# EAGLE board decoder (EAGLE 7.2.0)
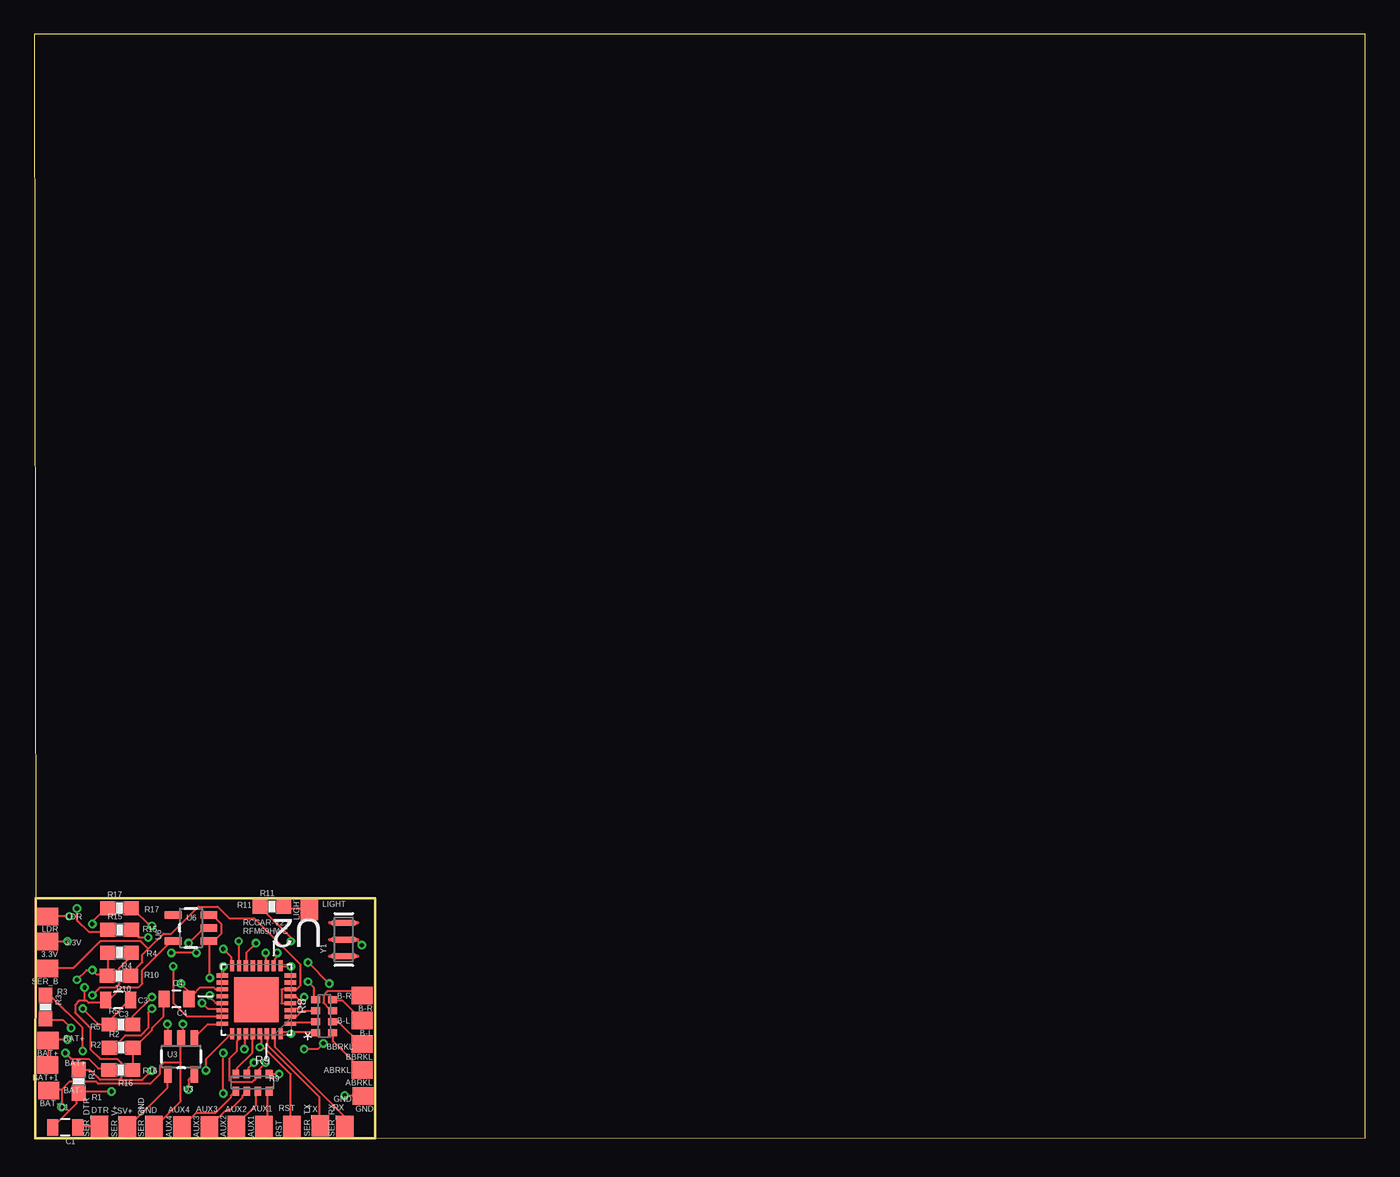
[diagram p0: board, top side]
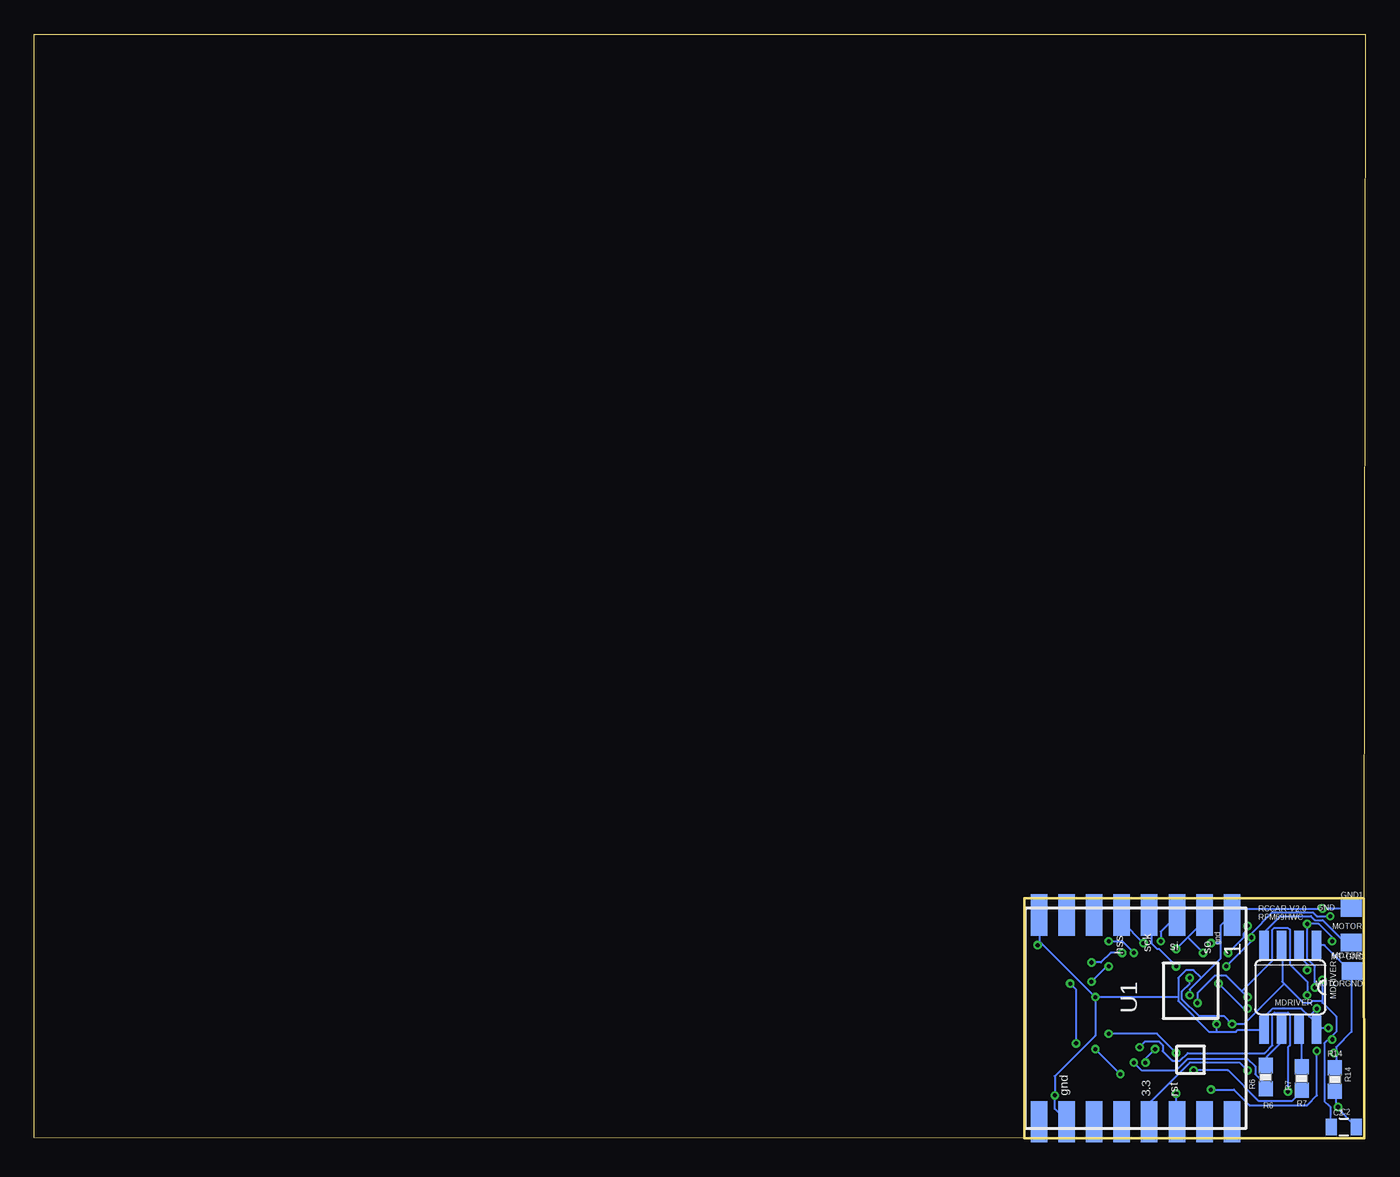
[diagram p1: board, bottom side, seen from below]

Size 96.51 x 80.04 mm. Coordinates in mm from the lower left corner, seen from the top.
Outline: 24.71,0 96.51,0.04 96.51,80.04 0,80.04 0.08,17.4
Outline: 0.08,17.4 24.7,17.41 24.71,0
Outline: 24.71,0 0.07,0.02 0.08,17.4
Copper layers (1*16): Top 0.035mm / dielectric 1.5mm / Bottom 0.035mm
Design rules "Elecrow_2-layer_eagle_rule *": minimum track width 5mil, minimum drill 12mil, track to track 6mil, track to pad 6mil, pad to pad 6mil, via to via 6mil, smd to smd 0mil, copper to edge 8mil, drill to drill 8mil, minimum pad ring 10mil, minimum via ring 6mil, stop-mask expansion 2mil, vias tented up to drill 100mil, thermal gap 10mil

## Footprints (pad centres in the part's own frame; a part is rotated, then mirrored left to right if it is on the bottom)
SMD1,27-2,54 = smd 1.27 x 1.524: 1 0,0
0805 = smd 0.8 x 1.2: 1 -0.9,0; 2 0.9,0
SO08 = smd 0.66 x 2.032: 1 -1.905,-3.073; 2 -0.635,-3.073; 3 0.635,-3.073; 4 1.905,-3.073; 5 1.905,3.073; 6 0.635,3.073; 7 -0.635,3.073; 8 -1.905,3.073
0603-RES = smd 1.1 x 1: 1 -0.85,0; 2 0.85,0
0603-ARV = smd 0.5 x 0.65: 1 -1.2,-0.625; 2 -0.4,-0.625; 3 0.4,-0.625; 4 1.2,-0.625; 5 1.2,0.625; 6 0.4,0.625; 7 -0.4,0.625; 8 -1.2,0.625
RFM69HCW-XXXS2 = smd 3 x 1.2: 1 -7.5,7; 2 -7.5,5; 3 -7.5,3; 4 -7.5,1; 5 -7.5,-1; 6 -7.5,-3; 7 -7.5,-5; 8 -7.5,-7; 9 7.5,-7; 10 7.5,-5; 11 7.5,-3; 12 7.5,-1; 13 7.5,1; 14 7.5,3; 15 7.5,5; 16 7.5,7
QFN50P500X500X100-33N = smd 0.813 x 0.305: 1 -2.464,1.753; 2 -2.464,1.245; 3 -2.464,0.762; 4 -2.464,0.254; 5 -2.464,-0.254; 6 -2.464,-0.762; 7 -2.464,-1.245; 8 -2.464,-1.753; 17 2.464,-1.753; 18 2.464,-1.245; 19 2.464,-0.762; 20 2.464,-0.254; 21 2.464,0.254; 22 2.464,0.762; 23 2.464,1.245; 24 2.464,1.753 | smd 0.305 x 0.813: 9 -1.753,-2.464; 10 -1.245,-2.464; 11 -0.762,-2.464; 12 -0.254,-2.464; 13 0.254,-2.464; 14 0.762,-2.464; 15 1.245,-2.464; 16 1.753,-2.464; 25 1.753,2.464; 26 1.245,2.464; 27 0.762,2.464; 28 0.254,2.464; 29 -0.254,2.464; 30 -0.762,2.464; 31 -1.245,2.464; 32 -1.753,2.464 | smd 3.251 x 3.251: 33 0,0
SOT23-5 = smd 0.55 x 1.2: 1 -0.95,-1.3; 2 0,-1.3; 3 0.95,-1.3; 4 0.95,1.3; 5 -0.95,1.3
RESONATOR-SMD = smd 0.45 x 1.905: 1 -1.2,0; 2 0,0; 3 1.2,0

## Placement (x,y rotation side)
3.3V  [SMD1,27-2,54]  0.95,14.28 90 top
ABRKL  [SMD1,27-2,54]  23.75,4.97 90 top
AUX1  [SMD1,27-2,54]  16.66,0.87 0 top
AUX2  [SMD1,27-2,54]  14.65,0.88 0 top
AUX3  [SMD1,27-2,54]  12.69,0.85 0 top
AUX4  [SMD1,27-2,54]  10.71,0.85 0 top
B-L  [SMD1,27-2,54]  23.76,8.55 90 top
B-R  [SMD1,27-2,54]  23.76,10.35 90 top
BAT+  [SMD1,27-2,54]  0.98,7.1 90 top
BAT+1  [SMD1,27-2,54]  0.97,5.33 90 top
BAT-  [SMD1,27-2,54]  1.02,3.46 90 top
BBRKL  [SMD1,27-2,54]  23.76,6.83 90 top
C1  0.1uF  [0805]  2.22,0.8 180 top
C2  4.7uF  [0805]  1.55,0.82 0 bottom
C3  4.7uF  [0805]  6.07,10.02 180 top
C4  4.7uF  [0805]  10.31,10.1 180 top
GND  [SMD1,27-2,54]  23.83,3.06 90 top
GND1  [SMD1,27-2,54]  1,16.7 270 bottom
LDR  [SMD1,27-2,54]  0.95,16.1 90 top
LIGHT  [SMD1,27-2,54]  19.95,16.58 0 top
MDRIVER  L9110S  [SO08]  5.42,10.95 180 bottom
MOTOR  [SMD1,27-2,54]  1,14.19 90 bottom
MOTORGND  [SMD1,27-2,54]  0.92,12.15 90 bottom
R1  10k  [0603-RES]  3.21,4.14 270 top
R2  2k2  [0603-RES]  6.29,6.57 0 top
R3  2K  [0603-RES]  0.8,9.52 270 top
R4  2K  [0603-RES]  6.17,13.46 180 top
R5  2K  [0603-RES]  6.27,8.26 0 top
R6  0  [0603-RES]  7.2,4.44 90 bottom
R7  0  [0603-RES]  4.6,4.34 90 bottom
R8  100  [0603-ARV]  21.01,8.86 270 top
R9  100  [0603-ARV]  15.81,4.04 180 top
R10  0  [0603-RES]  6.12,11.79 180 top
R11  68  [0603-RES]  17.23,16.8 0 top
R14  0  [0603-RES]  2.19,4.28 270 bottom
R15  68  [0603-RES]  6.18,15.12 0 top
R16  0  [0603-RES]  6.26,4.96 180 top
R17  10k  [0603-RES]  6.16,16.69 0 top
RST  [SMD1,27-2,54]  18.67,0.88 0 top
SER_B  [SMD1,27-2,54]  0.97,12.31 90 top
SER_DTR  [SMD1,27-2,54]  4.71,0.88 0 top
SER_GND  [SMD1,27-2,54]  8.68,0.86 0 top
SER_RX  [SMD1,27-2,54]  22.5,0.89 0 top
SER_TX  [SMD1,27-2,54]  20.73,0.9 0 top
SER_V+  [SMD1,27-2,54]  6.74,0.85 0 top
U1  RFM69HCW  [RFM69HCW-XXXS2]  16.65,8.71 270 bottom
U2  ATMEGA328P-MU  [QFN50P500X500X100-33N]  16.1,10.06 180 top
U3  MCP73831  [SOT23-5]  10.64,5.93 180 top
U6  MIC5219 3.3V  [SOT23-5]  11.36,15.26 90 top
Y1  16MHZ  [RESONATOR-SMD]  22.44,14.42 90 top

## Library data of the parts
3.3V ABRKL AUX1-AUX4 B-L B-R BAT+ BAT+1 BAT- BBRKL GND GND1 LDR LIGHT MOTOR MOTORGND RST SER_B SER_DTR SER_GND SER_RX SER_TX SER_V+ = wirepad
C1-C4 = SparkFun-Capacitors
MDRIVER = h-bridge-l9119s
R1-R11 R14-R17 = SparkFun-Resistors
U1 = SparkFun-RF
U2 = Atmel_By_element14_Batch_1-00; MPN: ATMEGA328P-MU; OC_FARNELL: 1748522; OC_NEWARK: 26R2526; PACKAGE: QFN-32; SUPPLIER: Atmel
U3 = SparkFun-PowerIC; PROD_ID: IC-09995
U6 = SparkFun-PowerIC; PROD_ID: VREG-09872
Y1 = SparkFun-FreqCtrl; PROD_ID: XTAL-08900

## Nets
A0: LDR.1 R15.2 U2.23
A1: U2.24 U3.1
A2: R7.1 U2.25
A3: R6.1 R9.2 U2.26
A4: R9.3 U2.27
A5: R9.4 U2.28
A6: C4.1 R2.1 U2.19
A7: R4.1 R5.2 U2.22
ABRKL: R8.4 U1.14 U2.32
AREF: U2.20
AVCC: U2.18
BAT+: BAT+1.1 BAT+.1 C2.1 MDRIVER.2 MDRIVER.3 R4.2 R10.2 U3.3 U6.1 U6.3
BBRKL: R8.3 U2.1
BL: R8.1 U2.9
BR: R8.2 U2.2
D6: R9.1 U2.10
D7: R11.1 U2.11
GND: BAT-.1 C2.2 C3.1 GND1.1 GND.1 MDRIVER.5 MDRIVER.8 R3.2 R5.1 R14.2 R15.1 SER_GND.1 U1.1 U1.8 U1.10 U2.3 U2.5 U2.21 U3.2 U6.2 Y1.2
MISO: R17.2 U1.2 U2.16
MOSI: U1.3 U2.15
N$1: C4.2 R2.2 R16.1
N$2: U2.8
N$3: C1.1 SER_DTR.1
N$4: U2.7
N$5: C1.2 R1.2 RST.1 U2.29
N$6: MDRIVER.6 R6.2
N$7: MDRIVER.7 R7.2
N$8: R10.1 SER_B.1 U2.4 U2.6
N$9: SER_V+.1 U3.4
N$11: R3.1 U3.5
N$12: LIGHT.1 R11.2
N$13: B-L.1 R8.8
N$16: B-R.1 R8.7
N$18: BBRKL.1 R8.6
N$20: ABRKL.1 R8.5
N$21: AUX1.1 R9.8
N$22: AUX2.1 R9.7
N$23: AUX3.1 R9.6
N$24: AUX4.1 R9.5
OA: MDRIVER.1 MOTORGND.1 R14.1 R16.2
OB: MDRIVER.4 MOTOR.1
RX: SER_TX.1 U2.30
SCK: U1.4 U2.17
SS: U1.5 U2.14
TX: SER_RX.1 U2.31
VCC: 3.3V.1 C3.2 R1.1 R17.1 U1.13 U6.5

## Tracks (layer width: path | path; a pad name or v marks a point on that pad's centre or on a via)
A0  (via drill 0.3)
  Top 0.127: v10.06,12.48 10.06,9.82 11.04,8.84 13.56,8.84 U2.23 | v8.25,14.57 7.55,14.57 7.13,14.99 R15.2 | v2.52,16.11 0.98,16.11 LDR.1
  Bottom 0.127: v10.06,12.48 8.25,14.29 v8.25,14.57 8.25,14.85 6.71,16.39 3.78,16.39 3.5,16.11 v2.52,16.11
A1
  Top 0.127: U2.24 13.56,8.28 12.58,8.28 11.6,7.31 U3.1
A2  (via drill 0.3)
  Top 0.127: v12.44,4.93 12.44,5.77 14.26,7.59 U2.25
  Bottom 0.127: v12.44,4.93 9.92,4.93 7.69,2.7 5.31,2.7 4.62,3.4 R7.1
A3  (via drill 0.3)
  Top 0.127: U2.26 14.81,7.59 14.81,7.17 14.67,7.03 14.67,6.33 14.12,5.77 14.12,4.23 14.26,4.09 15.79,4.09 16.07,4.37 16.07,4.65 R9.2 16.07,4.79 v16.77,5.49
  Bottom 0.127: v16.77,5.49 16.21,4.93 13.7,4.93 12.86,5.77 8.53,5.77 7.97,5.21 7.97,4.65 7.27,3.95 7.27,3.67 R6.1
A4  (via drill 0.3)
  Top 0.127: v15.93,5.49 15.51,5.07 15.51,4.79 R9.3 | v15.23,6.47 15.23,7.59 U2.27
  Bottom 0.127: v15.93,5.49 15.93,5.77 v15.23,6.47
A5
  Top 0.127: R9.4 14.67,4.79 14.67,5.07 15.79,6.19 15.79,7.59 U2.28
A6  (via drill 0.3)
  Top 0.127: 11.46,10.38 11.32,10.24 C4.1 11.46,10.38 | 11.46,10.38 12.02,10.94 13,10.94 13.14,10.8 13.56,10.8 U2.19 | v8.53,9.4 8.25,9.12 8.25,8.01 7.69,7.45 6.57,7.45 5.73,6.61 5.45,6.61 R2.1 | 11.46,10.38 v10.62,11.22
  Bottom 0.127: v8.53,9.4 8.81,9.4 v10.62,11.22
A7  (via drill 0.3)
  Top 0.127: v12.16,9.82 12.58,9.4 13.56,9.4 U2.22 | v8.53,10.24 7.13,8.84 7.13,8.28 R5.2 | v4.2,10.38 4.76,10.94 5.87,10.94 6.15,11.22 6.15,12.34 6.99,13.17 6.99,13.45 R4.1
  Bottom 0.127: v12.16,9.82 12.16,10.52 10.9,11.78 10.06,11.78 8.95,10.66 | v8.53,10.24 8.95,10.66 | v4.2,10.38 4.2,11.36 5.45,12.62 5.45,15.13 5.59,15.27 6.57,15.27 6.71,15.13 6.71,12.89 8.95,10.66
ABRKL  (via drill 0.3)
  Top 0.127: 18.59,7.73 17.89,7.73 U2.32 | 18.59,7.73 20.26,7.73 R8.4 | v18.59,7.59 18.59,7.73 | v13.7,3.26 v13.7,6.19
  Bottom 0.127: v18.59,7.59 15.09,7.59 v13.7,6.19 | v13.7,3.26 13.7,1.3 U1.14
BAT+  (via drill 0.3)
  Top 0.127: R4.2 5.31,11.92 R10.2 5.17,11.92 4.48,11.92 v4.2,12.2 3.78,12.2 v3.08,11.5 | BAT+1.1 0.98,5.35 0.98,7.03 BAT+.1 0.98,7.17 v2.38,7.17 | U6.3 12.72,16.11 13,16.11 13.56,15.55 13.56,14.85 13.14,14.43 12.72,14.43 U6.1 12.72,14.29 v12.72,11.64 | v9.65,8.28 9.65,7.31 U3.3
  Bottom 0.127: v4.2,12.2 4.2,12.62 4.76,13.17 4.76,14.01 MDRIVER.2 | 2.52,7.31 2.1,7.73 2.1,8.84 3.08,9.82 | 2.52,7.31 2.94,6.89 2.94,2.7 2.52,2.28 2.52,0.88 C2.1 | 3.08,9.82 3.22,9.96 3.78,9.96 3.92,9.82 4.48,9.82 5.87,11.22 | 5.87,11.22 6.01,11.36 6.01,14.01 MDRIVER.3 | 5.87,11.22 8.81,8.28 v9.65,8.28 10.2,8.84 12.02,8.84 13.28,10.1 13.28,10.66 12.72,11.22 v12.72,11.64 | 2.52,7.31 v2.38,7.17 | 3.08,9.82 v3.08,11.5
BBRKL
  Top 0.127: R8.3 20.26,8.42 18.59,8.42 U2.1
BL  (via drill 0.3)
  Top 0.127: v19.84,11.36 20.26,10.94 20.26,10.1 R8.1 | v18.59,12.48 17.89,12.48 U2.9
  Bottom 0.127: v19.84,11.36 18.73,12.48 v18.59,12.48
BR
  Top 0.127: R8.2 20.26,9.26 19.42,9.26 19.01,8.84 18.59,8.84 U2.2
D6  (via drill 0.3)
  Top 0.127: v17.75,4.65 17.05,4.65 R9.1 | v19.56,6.47 20.54,6.47 v20.96,6.89 | v19.84,12.76 v21.38,11.22 | v17.61,13.45 17.61,13.17 17.47,13.03 17.47,12.62 U2.10
  Bottom 0.127: v19.56,6.47 v17.75,4.65 | v20.96,6.89 20.96,10.8 v21.38,11.22 | v19.84,12.76 19.14,12.76 18.45,13.45 v17.61,13.45
D7  (via drill 0.3)
  Top 0.127: v16.77,13.45 16.77,12.62 U2.11 | v18.59,14.29 18.59,14.57 16.49,16.67 R11.1
  Bottom 0.127: v16.77,13.45 17.61,14.29 v18.59,14.29
GND  (via drill 0.3)
  Top 0.127: v22.5,3.12 23.75,3.12 GND.1 | 19.28,9.96 19.28,9.54 19.14,9.4 18.59,9.4 U2.3 | 19.28,9.96 19.01,10.24 18.59,10.24 U2.5 | v19.56,10.24 19.28,9.96 | v23.75,14.01 23.48,14.29 Y1.2 | 10.62,5.49 10.62,2.7 8.81,0.88 SER_GND.1 | 10.62,5.49 10.62,7.17 U3.2 10.76,7.31 v10.76,8.28 | 1.96,3.54 1.12,3.54 BAT-.1 | 1.96,3.54 2.52,4.09 4.48,4.09 4.62,3.95 8.39,3.95 9.09,4.65 9.09,5.21 9.37,5.49 10.62,5.49 | 1.96,3.54 v1.96,2.28 | C3.1 6.85,9.96 5.45,8.56 5.45,8.28 R5.1 5.31,8.28 4.62,8.28 v3.5,9.4 | v2.66,8.01 2.1,8.56 0.84,8.56 R3.2 | v3.08,16.67 3.08,15.83 3.92,14.99 5.31,14.99 R15.1 | v12.72,10.38 12.72,10.24 13.14,9.82 13.56,9.82 U2.21 | v11.18,14.15 12.16,15.13 12.58,15.13 U6.2
  Bottom 0.127: U1.10 21.66,1.3 22.5,2.14 v22.5,3.12 22.5,4.51 19.56,7.45 v19.56,10.24 | 23.34,14.01 23.62,14.29 23.62,16.11 U1.8 | 23.34,14.01 v19.56,10.24 | 23.34,14.01 v23.75,14.01 | 2.1,2.28 2.1,3.4 R14.2 | 2.1,2.28 0.7,0.88 C2.2 | v1.96,2.28 2.1,2.28 | v2.66,8.01 3.5,8.01 MDRIVER.8 3.64,8.01 3.64,8.42 4.06,8.84 | 4.06,8.84 4.62,9.4 6.71,9.4 7.27,8.84 7.27,8.01 MDRIVER.5 7.41,7.87 9.23,7.87 9.37,7.73 10.76,7.73 | 4.06,8.84 v3.5,9.4 | GND1.1 1.12,16.67 v3.08,16.67 9.23,16.67 9.65,16.25 U1.1 9.78,16.11 10.48,15.41 10.48,14.15 | v12.72,10.38 12.72,10.8 11.88,11.64 | 11.88,11.64 10.48,13.03 10.48,14.15 | 10.48,14.15 v11.18,14.15 | 10.76,7.73 11.32,7.73 13.56,9.96 13.56,10.24 | 13.56,10.24 13.56,11.64 13,12.2 12.44,12.2 11.88,11.64 | 10.76,7.73 v10.76,8.28 | 13.56,10.24 v19.56,10.24
MISO  (via drill 0.3)
  Top 0.127: v13.7,13.73 14.26,13.17 14.26,12.62 U2.16 | v8.53,15.41 8.39,15.41 7.13,16.67 R17.2 | v11.74,13.45 v9.92,13.45
  Bottom 0.127: 12.86,14.57 11.74,15.69 11.74,16.11 U1.2 | 12.86,14.57 v13.7,13.73 | v8.53,15.41 8.53,15.13 8.81,14.85 8.81,14.57 v9.92,13.45 | 12.86,14.57 v11.74,13.45
MOSI  (via drill 0.3)
  Top 0.127: v14.81,14.29 14.81,12.62 U2.15
  Bottom 0.127: v14.81,14.29 14.81,14.99 13.7,16.11 U1.3
N$1
  Top 0.127: R16.1 7.13,5.07 7.13,6.47 R2.2 7.27,6.61 8.53,7.87 8.53,8.01 9.37,8.84 9.37,10.1 C4.2
N$3
  Top 0.127: C1.1 3.22,0.88 4.62,0.88 SER_DTR.1
N$5  (via drill 0.3)
  Top 0.127: C1.2 1.4,0.88 3.08,2.56 3.08,3.26 R1.2 3.22,3.4 v5.59,3.4 | 16.49,6.75 16.49,7.59 U2.29 | 16.49,6.75 18.59,4.65 18.59,0.88 RST.1 | 16.49,6.75 v16.35,6.61
  Bottom 0.127: v5.59,3.4 5.59,6.61 5.45,6.75 5.45,8.98 5.59,9.12 6.57,9.12 6.71,8.98 6.71,6.75 7.27,6.19 12.86,6.19 13.42,5.63 13.98,5.63 14.67,6.33 14.67,6.75 14.95,7.03 15.93,7.03 v16.35,6.61
N$6
  Bottom 0.127: R6.2 7.13,5.35 7.13,5.91 6.15,6.89 6.15,7.87 MDRIVER.6
N$7
  Bottom 0.127: R7.2 4.62,5.21 4.62,7.73 4.76,7.87 MDRIVER.7
N$8
  Top 0.127: 18.59,10.8 19.01,10.8 19.28,11.08 19.28,12.62 15.93,15.97 14.12,15.97 13.28,16.81 11.88,16.81 9.92,14.85 9.37,14.85 8.25,13.73 | 8.25,13.73 7.83,13.31 7.83,12.76 6.99,11.92 R10.1 | 18.59,10.8 U2.6 | 8.25,13.73 7.69,14.29 4.76,14.29 2.8,12.34 0.98,12.34 SER_B.1 | 18.59,10.8 17.93,10.8 17.93,9.8 U2.4
N$9
  Top 0.127: U3.4 9.65,4.51 9.65,3.67 6.85,0.88 SER_V+.1
N$11  (via drill 0.3)
  Top 0.127: v3.5,6.33 3.5,8.01 1.26,10.24 0.84,10.24 R3.1 | v11.18,3.54 11.18,4.23 11.46,4.51 U3.5
  Bottom 0.127: v3.5,6.33 3.5,3.12 4.2,2.42 8.39,2.42 9.51,3.54 v11.18,3.54
N$12
  Top 0.127: R11.2 18.17,16.67 19.84,16.67 LIGHT.1
N$13
  Top 0.127: R8.8 21.66,9.96 22.36,9.96 23.75,8.56 B-L.1
N$16
  Top 0.127: R8.7 21.52,9.4 21.38,9.4 20.96,9.82 20.96,10.38 21.24,10.66 23.48,10.66 23.75,10.38 B-R.1
N$18
  Top 0.127: R8.6 21.66,8.42 22.08,8.42 23.75,6.75 BBRKL.1
N$20
  Top 0.127: R8.5 21.66,7.59 21.66,7.03 23.62,5.07 ABRKL.1
N$21
  Top 0.127: R9.8 16.91,3.4 16.91,1.02 16.77,0.88 AUX1.1
N$22
  Top 0.127: R9.7 16.07,3.4 16.07,2.42 14.67,1.02 AUX2.1
N$23
  Top 0.127: R9.6 15.37,3.4 15.09,3.12 15.09,2.98 14.12,2 13.84,2 12.72,0.88 AUX3.1
N$24
  Top 0.127: R9.5 14.53,3.4 14.26,3.12 14.26,2.98 13.14,1.86 11.74,1.86 10.76,0.88 AUX4.1
OA  (via drill 0.3)
  Top 0.127: v2.24,6.19 2.66,5.77 3.92,5.77 4.62,5.07 5.31,5.07 R16.2
  Bottom 0.127: 2.1,6.19 2.1,6.61 0.98,7.73 0.98,12.06 | 2.1,6.19 2.1,5.21 R14.1 | 2.1,6.19 v2.24,6.19 | 0.98,12.06 2.94,14.01 3.5,14.01 MDRIVER.1 | 0.98,12.06 MOTORGND.1
OB
  Bottom 0.127: MOTOR.1 1.12,14.29 1.54,14.29 3.08,15.83 3.64,15.83 3.92,16.11 6.15,16.11 7.27,14.99 7.27,14.15 MDRIVER.4
RX
  Top 0.127: U2.30 16.91,7.59 16.91,6.75 20.68,2.98 20.68,1.02 SER_TX.1
SCK  (via drill 0.3)
  Top 0.127: v13.7,12.48 13.7,11.92 U2.17
  Bottom 0.127: v13.7,12.48 14.95,13.73 15.09,13.73 15.51,14.15 15.51,16.11 U1.4
SS  (via drill 0.3)
  Top 0.127: v16.07,14.15 15.37,13.45 15.37,12.62 U2.14
  Bottom 0.127: v16.07,14.15 17.61,15.69 17.61,16.11 U1.5
TX
  Top 0.127: U2.31 17.47,7.59 17.47,6.61 22.5,1.58 22.5,1.02 SER_RX.1
VCC  (via drill 0.3)
  Top 0.127: v4.2,15.55 4.2,15.69 5.17,16.67 R17.1 | v2.38,14.29 0.98,14.29 3.3V.1 | 6.15,4.23 4.76,4.23 4.06,4.93 3.22,4.93 R1.1 | 6.15,4.23 6.29,4.37 6.29,5.49 6.01,5.77 4.76,5.77 4.06,6.47 4.06,8.01 2.94,9.12 2.94,9.68 3.22,9.96 3.64,9.96 | 3.64,9.96 3.78,9.96 3.92,9.82 4.9,9.82 5.04,9.96 C3.2 5.17,10.1 5.45,10.1 6.29,10.94 7.55,10.94 7.83,11.22 7.83,12.2 9.92,14.29 U6.5 | v8.53,4.93 7.83,4.23 6.15,4.23 | 3.64,9.96 v3.64,10.94
  Bottom 0.127: v2.38,14.29 2.38,14.57 3.36,15.55 v4.2,15.55 4.2,13.03 3.64,12.48 v3.64,10.94 | v8.53,4.93 9.09,5.49 12.72,5.49 15.51,2.7 15.51,1.3 U1.13

## Text on the board
_tsilk: R11 | LIGHT | LDR | R17 | U6 | R15 | RCCAR-V2.0 / RFM69HWC | 3.3V | R4 | R10 | C4 | R3 | C3 | B-R | R5 | B-L | BAT+ | R2 | U3 | BBRKL | BAT+ | R16 | ABRKL | R9 | BAT- | R1 | GND | C1 | DTR | SV+ | GND | AUX4 | AUX3 | AUX2 | AUX1 | RST | TX | RX
_bsilk: GND | RCCAR-V2.0 / RFM69HWC | MOTOR | gnd | so | si | MT-GND | sck | hss | MDRIVER | R14 | rst | 3.3 | gnd | C2 | R7 | R6